# Altium PCB Telemetria.PcbDoc
Units mm, origin at the board's own origin, x right, y up, seen from the top; angles counter-clockwise.
Board outline 60.32 x 119.89 mm, 2 copper layers (Top Layer, Bottom Layer); 20 components, 15 nets, 82 pads, 8 vias.
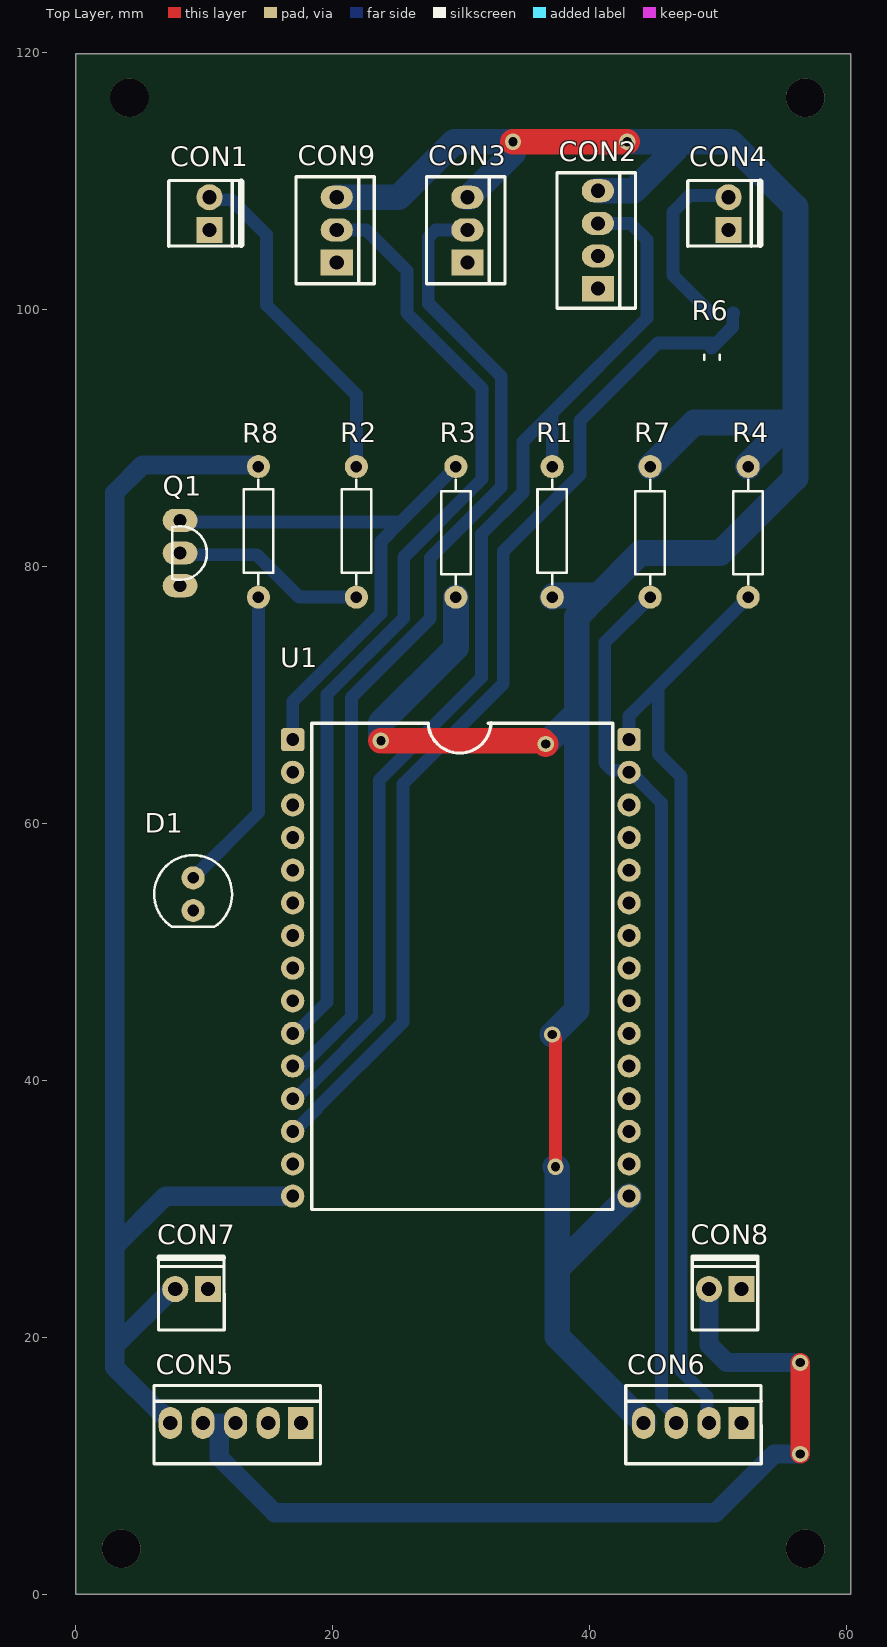
[diagram p0: Top Layer view]
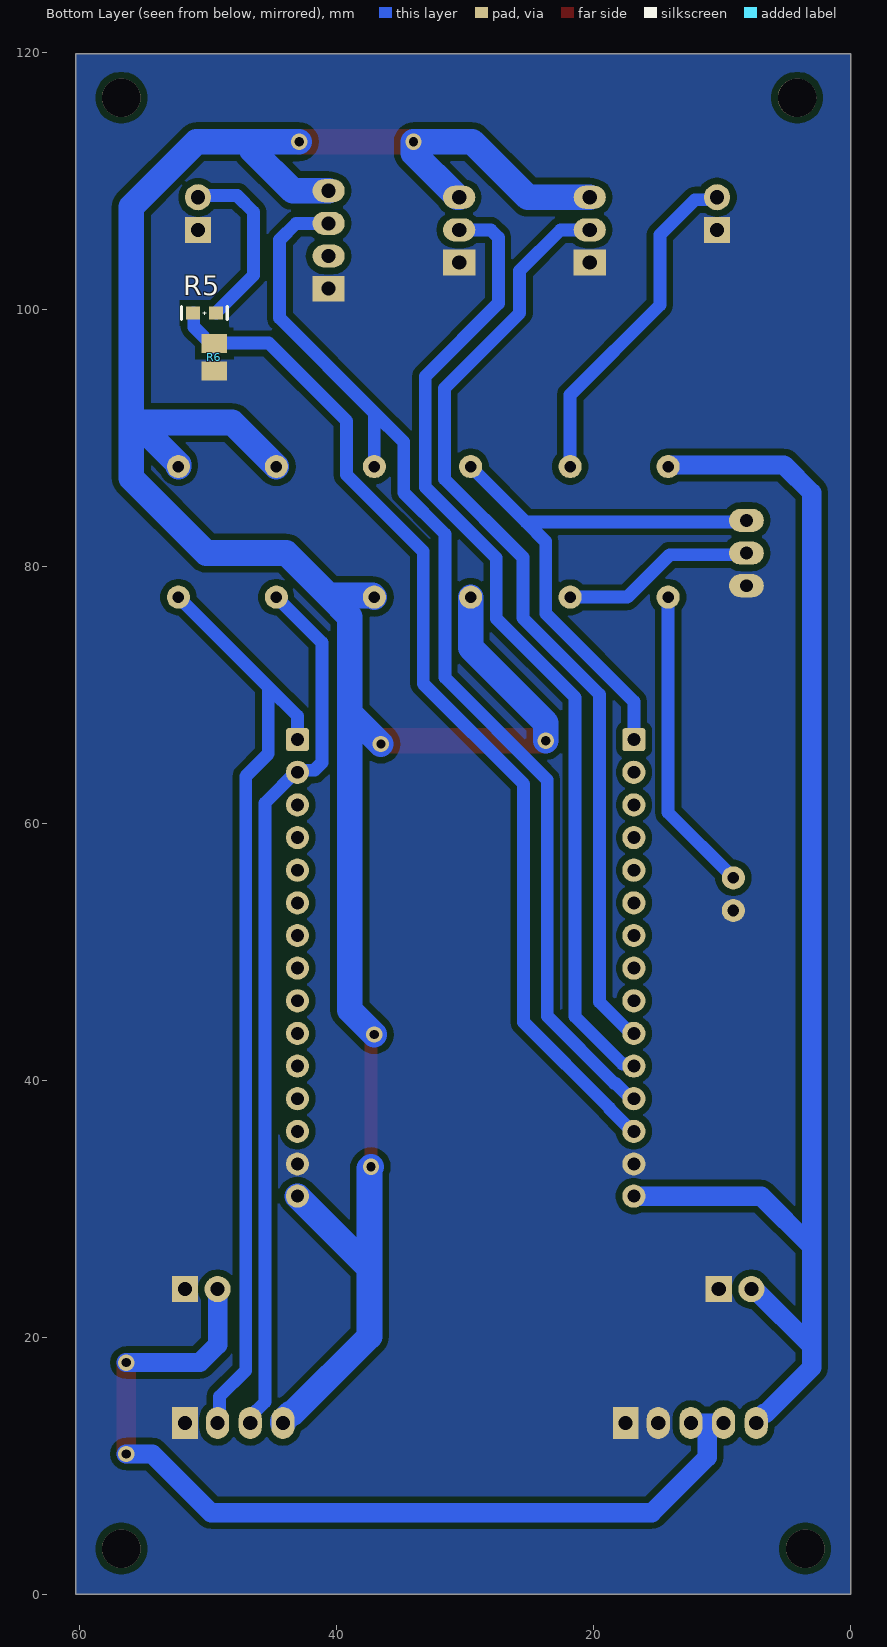
[diagram p1: Bottom Layer view, seen from below]

## Layer stack, top to bottom
Top Solder: solder mask 0.0102, Solder Resist, Dk 3.5
Top Layer: signal copper 0.0356
Dielectric 1: dielectric 0.32, FR-4, Dk 4.8
Bottom Layer: signal copper 0.0356
Bottom Solder: solder mask 0.0102, Solder Resist, Dk 3.5

## Board outline
0,0 60.325,0 60.325,119.888 0,119.888

## Design rules (kind name [scope] priority, off if disabled: settings)
Clearance [All] p1: gap=0.5 ignorepadtopadclearanceinfootprint=FALSE except(0: Arc-Text Arc-Hole Track-Text Track-Hole SMDPad-Text SMDPad-Hole THPad-Text THPad-Hole Via-Text Via-Hole Fill-Text Fill-Hole Poly-Text Poly-Hole Region-Text Region-Hole Text-Text Text-Hole)
ComponentClearance [All] p1: gap=0.3 collisioncheckmode=3 verticalgap=0.254 showdistances=FALSE
HoleSize [All] p1: absolutevalues=TRUE maxlimit=3 minlimit=0.75 maxpercent=80.000 minpercent=20.000
HoleToHoleClearance [All] p1: gap=0.1 allowstackedmicrovias=TRUE
MinimumSolderMaskSliver [All] p1: minsoldermaskwidth=0.05
PolygonConnect [All] p1: connectstyle=Relief reliefconductorwidth=0.254 reliefentries=4 polygonreliefangle="90 Angle" airgapwidth=0.254
RoomDefinition Telemetria [InComponentClass('Telemetria')] p1: confinementstyle=ConfineIn formatcopy=TRUE lockcomponents=FALSE outline -25.4,-25.4 25.4,-25.4 25.4,0 -25.4,0
RoutingVias [All] p1: holewidth=0.9 width=2 viastyle="Through Hole" minholewidth=0.9 minwidth=2 maxholewidth=0.9 maxwidth=2
SilkToSilkClearance [All] p1: silktosilkclearance=0
SilkToSolderMaskClearance [IsPad] p1: minsilkscreentomaskgap=0 clearancetoexposedcopper=TRUE
SolderMaskExpansion [All] p1: expansion=0.102 istentingtop=FALSE
Width [All] p1: maxlimit=5 minlimit=0.5 preferedwidth=1 minimp=50.000000 maximp=50.000000 favimp=50.000000
24 further rules are at their usual default settings.

## Components (designator, comment, footprint, x,y, rotation, side; value= is the part's Value field where it differs from the comment)
CON1 "KK_2.54_2vias" KK_2VIAS_180º 10.414,106.172 r90 top
CON2 "KK_2.54_4vias" KK_4vias_180° 40.64,101.6 r90 top
CON3 "KK_2.54_3vias" KK_3vias_180º 30.48,103.632 r90 top
CON4 "KK_2.54_2vias" KK_2VIAS_180º 50.8,106.172 r90 top
CON5 "KK_2.54_5vias" KK_5vias_180° 17.526,13.335 r180 top
CON6 "KK_2.54_4vias" KK_4vias_180° 51.816,13.335 r180 top
CON7 "KK_2.54_2vias" KK_2VIAS_180º 10.287,23.749 r180 top
CON8 "KK_2.54_2vias" KK_2VIAS_180º 51.816,23.749 r180 top
CON9 "KK_2.54_3vias" KK_3vias_180º 20.32,103.632 r90 top
D1 "LED 5MM RED" "LED 5MM RED" 9.144,54.483 r270 top
Q1 "BC549" TO92 8.128,81.026 r270 top
R1 "RES 470R 1/4W CARBON FILM" "RES 470R 1/4W CARBON FILM" 37.084,82.677 r90 top
R2 "RES 470R 1/4W CARBON FILM" "RES 470R 1/4W CARBON FILM" 21.844,82.677 r90 top
R3 "RES 470R 1/4W CARBON FILM" "RES 470R 1/4W CARBON FILM" 29.591,82.677 r270 top
R4 "4.7K" "RES 4.7K 1/4W CARBON FILM" 52.324,82.677 r270 top
R5 "1M6" "RESISTOR 0603" 50.292,99.695 r0 bottom
R6 "140K" "RESISTOR 0805" 49.53,96.266 r270 bottom
R7 "4.7K" "RES 4.7K 1/4W CARBON FILM" 44.704,82.677 r270 top
R8 "RES 470R 1/4W CARBON FILM" "RES 470R 1/4W CARBON FILM" 14.224,82.677 r90 top
U1 "microcontrolador" ESP32_Desvikit_v1 16.891,66.508 r0 top value="ESP32 Desvikit V1"

## Footprints (in the part's own frame and the unit in brackets; to place one, negate y for a bottom-side part, rotate by r counter-clockwise, add the part's x,y. Pads: shape width x height; smd on the part's side, far side on the other; paste and mask are expansions set on the pad)
ESP32_Desvikit_v1 [mm]
  rrect25% 1.8x1.8 hole 1: 1(0,0) 30(26.175,0)
  round 1.8 hole 1: 2(0,-2.54) 3(0,-5.08) 4(0,-7.62) 5(0,-10.16) 6(0,-12.7) 7(0,-15.24) 8(0,-17.78) 9(0,-20.32) 10(0,-22.86) 11(0,-25.4) 12(0,-27.94) 13(0,-30.48) 14(0,-33.02) 15(0,-35.52) 16(26.175,-35.52) 17(26.175,-33.02) 18(26.175,-30.48) 19(26.175,-27.94) 20(26.175,-25.4) 21(26.175,-22.86) 22(26.175,-20.32) 23(26.175,-17.78) 24(26.175,-15.24) 25(26.175,-12.7) 26(26.175,-10.16) 27(26.175,-7.62) 28(26.175,-5.08) 29(26.175,-2.54)
  silkscreen extent 1.47,-36.57 24.9,1.31, body extent -1.2,-46.07 27.48,4.86, height 16.2
KK_2VIAS_180º [mil]
  rect 80x80 hole 43.31: 1(0,0)
  round 80 hole 43.31: 2(100,0)
  silkscreen extent -50,-101 151,125, body extent -61,-108 165,128, height 464
KK_3vias_180º [mm]
  rect 2x2.5 hole 1.1: 1(0,0)
  oval 1.8x2.5 hole 1.1: 2(2.54,0) 3(5.08,0)
  silkscreen extent -1.65,-2.92 6.69,3.18, body extent -1.6,-2.95 6.69,3.05, height 11.9
KK_4vias_180° [mm]
  rect 2x2.5 hole 1.1: 1(0,0)
  oval 1.8x2.5 hole 1.1: 2(2.54,0) 3(5.08,0) 4(7.62,0)
  silkscreen extent -1.53,-2.92 9.02,3.18, body extent -1.4,-2.79 8.76,3.01, height 10.12
KK_5vias_180° [mm]
  rect 2x2.5 hole 1.1: 1(0,0)
  oval 1.8x2.5 hole 1.1: 2(2.54,0) 3(5.08,0) 4(7.62,0) 5(10.16,0)
  silkscreen extent -1.53,-2.92 11.43,3.18, body extent -1.4,-2.79 11.3,3.01, height 10.12
"LED 5MM RED" [mm]
  round 1.8 hole 0.9: 1(-1.27,0) 2(1.27,0)
  silkscreen extent -3.03,-3.03 2.54,3.03, body extent -2.98,-3.01 2.44,3.01, height 9.31
"RES 4.7K 1/4W CARBON FILM" [mm]
  round 1.8 hole 0.9: 1(-5.08,0) 2(5.08,0)
  silkscreen extent -4.06,-1.14 4.06,1.14, body extent -5.47,-1.27 5.47,1.27, height 3.27
"RES 470R 1/4W CARBON FILM" [mm]
  round 1.8 hole 0.9: 1(-5.08,0) 2(5.08,0)
  silkscreen extent -4.06,-1.14 4.06,1.14, body extent -5.47,-1.27 5.47,1.27, height 3.27
"RESISTOR 0603" [mm] "RES 5% 0603"
  rect 1.1x1 smd: 1(-0.877,-0.011) 2(0.889,0)
  silkscreen extent -1.77,-0.52 1.79,0.5, body extent -0.8,-0.4 0.8,0.4, height 0.3
"RESISTOR 0805" [mm] "Chip Resistor, 2-Leads, Body 2,00x1,25mm, IPC Low Density"
  rect 1.5x2 smd: 1(-1.075,0) 2(1.075,0)
  body extent -1,-0.63 1,0.63, height 0.6
TO92 [mm]
  oval 1.8x2.7 hole 1: 1(-2.54,0) 2(0,0) 3(2.54,0)
  silkscreen extent -2.09,-0.6 2.09,2.08, body extent -2.74,-0.57 2.74,2.04, height 6.83

## Part data
CON1 CON4 CON7 CON8: "Conector KK 2.54mm 2 vias", Descrição="Conector KK 3 vias com passo 2.54mm", Encapsulamento="PTH - 180º", Modelo="2 vias - 180º", Valor="KK 2 vias 180º"
CON2 CON6: "Conector KK 2.54mm 4 vias", Descrição="Conector KK 3 vias com passo 2.54mm", Encapsulamento="PTH - 180º", Modelo="3 vias - 180º", Valor="KK 4 vias 180º"
CON3 CON9: "Conector KK 2.54mm 3 vias", Descrição="Conector KK 3 vias com passo 2.54mm", Encapsulamento="PTH - 180º", Modelo="3 vias - 180º", Valor="KK 3 vias 180º"
CON5: "Conector KK 2.54mm 5 vias", Descrição="Conector KK 3 vias com passo 2.54mm", Encapsulamento="PTH - 180º", Modelo="3 vias - 180º", Valor="KK 5 vias 180º"
D1: Current If Luminous Intensity=2, Forward Current If=20, Forward Voltage VF Max=2.5, LED Colour=Red, Manufacturer=Paralight, Manufacturer Part Number=IMP585, Operating Temperature Max=85, Operating Temperature Min=-40, Operating Temperature Range="-40°C to +85", Peak Forward Current=7, Supplier Part Number 1="Led 3mm Vermelho Difuso L-314HD - Paralight", Voltage Vf Typ="2.2V<!--FANDB--><div class=\"features-and-benefits-container\"><div class=\"features-and-benefits-description\"><span class=\"features-benefits-value\">The L-934LID from Kingbright is a through hole round shape high efficiency red colour LED. The device is made of gallium arsenide phosphide on gallium phosphide orange light emitting diode. This LED is widely used because of low power consumption, long life and solid state reliability.</span></div><div class=\"features-and-benefits-list\"><ul class=\"features-and-benefits-list-list\"><li class=\"features-and-benefits-list-item\">Standard bulb size of T-1 (3mm)</li><li class=\"features-and-benefits-list-item\">Reliable and rugged</li><li class=\"features-and-benefits-list-item\">Viewing angle is 60°</li><li class=\"features-and-benefits-list-item\">Luminous intensity of 3mcd at 2mA</li><li class=\"features-and-benefits-list-item\">Forward voltage is 2.0V</li><li class=\"features-and-benefits-list-item\">Forward current (If) is 20mA</li><li class=\"features-and-benefits-list-item\">Dominant wavelength is 625nm at IF=20mA</li><li class=\"features-and-benefits-list-item\">Peak wavelength is 627nm at IF=20", Bulb Size=3mm, ComponentLink1Description=http://loja.multcomercial.com.br/led-3mm-vermelho-difuso-l-314hd-paralight.html, ComponentLink1URL=http://loja.multcomercial.com.br/led-3mm-vermelho-difuso-l-314hd-paralight.html, Dominant Wavelength=625, External Diameter=2.9, External Length / Height=4.6, Forward Current If Max=20, Forward Voltage=2, Lead Cross-section Depth=0.5, Lead Cross-section Width=0.5, Lead Spacing=2.54, LED / Lamp Size="3mm / T-1", LED Mounting="Through Hole", LED Type=Standard, Lens Shape=Round, Luminous Intensity=3, Luminous Intensity @ If Min=0.7, Luminous Intensity Typ=3, Mounting Type="PCB Through Hole", MSL=-, No. of Pins=2, Packaging=Each, Peak Wavelength=625, PIV Max=5, Pricing 1="1=0.15 (BRL)", RoHS=YES, Stock 1=35260, Supplier 1="Mult Comercial", SVHC="No SVHC (15-Jun-2015)", Viewing Angle=60°, Wavelength Typ=625
Q1: "TRANS NPN 30V 0.1A TO-92", Collector- Base Voltage VCBO="30 V", Collector-Emitter Saturation Voltage="200 mV", DC Current Gain hFE Max=800, Emitter- Base Voltage VEBO="5 V", Manufacturer="Fairchild Semiconductor", Maximum DC Collector Current="0.1 A", Maximum Operating Temperature="+ 150 C", Maximum Power Dissipation="0.5 W", Minimum Operating Temperature="- 65 C", Package / Case=TO-92-3, Supplier Part Number 1=512-BC549, Brand="Fairchild Semiconductor", Collector- Emitter Voltage VCEO Max="30 V", ComponentLink1Description=https://datasheet.ciiva.com/982/bc546-982130.pdf, ComponentLink1URL=https://datasheet.ciiva.com/982/bc546-982130.pdf, ComponentLink2Description=https://datasheet.ciiva.com/17179/bc549-17179663.pdf, ComponentLink2URL=https://datasheet.ciiva.com/17179/bc549-17179663.pdf, Configuration=Single, DC Collector/Base Gain hfe Min=110, Factory Pack Quantity=2000, Gain Bandwidth Product fT="300 MHz", Manufacturer Part Number=BC549, Mounting Style="Through Hole", Packaging=Bulk, Product Category="Bipolar Transistors - BJT", RoHS=Details, Series=BC549, Supplier 1=Mouser, Transistor Polarity=NPN
R1: "RES 470R OHM 1/4W 5% CARBON FILM", Manufacturer=Ty-Ohm, Manufacturer Part Number=CR25, Operating Temperature="-55°C ~ 155°C", Package / Case=Axial, Power (Watts)="0.25W, 1/4W", Resistance (Ohms)=10kR, Supplier Part Number 1="Resistor de Filme de Carbono 1/4 de Watt CR25 5% de tolerância - 0.22R Ω à 10M Ω", Temperature Coefficient="0/ -500ppm/°C", Tolerance=±5%, Category=Resistors, ComponentLink1Description=http://loja.multcomercial.com.br/resistor-de-1-4-de-watt-cr25-5-de-tolerancia.html, ComponentLink1URL=http://loja.multcomercial.com.br/resistor-de-1-4-de-watt-cr25-5-de-tolerancia.html, Composition="Carbon Film", Features="Flame Retardant Coating, Safety", Height=-, Number of Terminations=2, Packaging="Cut Tape (CT)", Pricing 1="1=0.20 (BRL)", RoHS="RoHS Compliant", Size / Dimension="0.091\" Dia x 0.256\" L (2.30mm x 6.50mm)", Stock 1=617543, Supplier 1="Mult Comercial", Supplier Device Package=Axial
R2 R3: "RES 470R OHM 1/4W 5% CARBON FILM", Manufacturer=Ty-Ohm, Manufacturer Part Number=CR25, Operating Temperature="-55°C ~ 155°C", Package / Case=Axial, Power (Watts)="0.25W, 1/4W", Resistance (Ohms)=2200R, Supplier Part Number 1="Resistor de Filme de Carbono 1/4 de Watt CR25 5% de tolerância - 0.22R Ω à 10M Ω", Temperature Coefficient="0/ -500ppm/°C", Tolerance=±5%, Category=Resistors, ComponentLink1Description=http://loja.multcomercial.com.br/resistor-de-1-4-de-watt-cr25-5-de-tolerancia.html, ComponentLink1URL=http://loja.multcomercial.com.br/resistor-de-1-4-de-watt-cr25-5-de-tolerancia.html, Composition="Carbon Film", Features="Flame Retardant Coating, Safety", Height=-, Number of Terminations=2, Packaging="Cut Tape (CT)", Pricing 1="1=0.20 (BRL)", RoHS="RoHS Compliant", Size / Dimension="0.091\" Dia x 0.256\" L (2.30mm x 6.50mm)", Stock 1=617543, Supplier 1="Mult Comercial", Supplier Device Package=Axial
R4 R7: library part "RES 4.7K 1/4W CARBON FILM", "RES 4.7K OHM 1/4W 5% CARBON FILM", Manufacturer=Ty-Ohm, Manufacturer Part Number=CR25, Operating Temperature="-55°C ~ 155°C", Package / Case=Axial, Power (Watts)="0.25W, 1/4W", Resistance (Ohms)=?, Supplier Part Number 1="Resistor de Filme de Carbono 1/4 de Watt CR25 5% de tolerância - 0.22R Ω à 10M Ω", Temperature Coefficient="0/ -500ppm/°C", Tolerance=±5%, Category=Resistors, ComponentLink1Description=http://loja.multcomercial.com.br/resistor-de-1-4-de-watt-cr25-5-de-tolerancia.html, ComponentLink1URL=http://loja.multcomercial.com.br/resistor-de-1-4-de-watt-cr25-5-de-tolerancia.html, Composition="Carbon Film", Features="Flame Retardant Coating, Safety", Height=-, Number of Terminations=2, Packaging="Cut Tape (CT)", Pricing 1="1=0.20 (BRL)", RoHS="RoHS Compliant", Size / Dimension="0.091\" Dia x 0.256\" L (2.30mm x 6.50mm)", Stock 1=617543, Supplier 1="Mult Comercial", Supplier Device Package=Axial
R5: library part "RES 0R 5% 0603", Case Code - in=0603, Case Code - mm=1608, Manufacturer="PANASONIC ELECTRONIC COMPONENTS", Manufacturer Part Number=ERJ-3GEY0R00V, Operating Temperature="-55°C ~ 155°C", Operating Temperature Range="- 55 C to + 155 C", Package / Case="0603 (1608 Metric)", Power (Watts)="0.1W, 1/10W", Power Rating=100, Resistance=0, Resistance (Ohms)=0.0, Resistance Tolerance=-, Resistor Case Style="0603 [1608 Metric]", Supplier Part Number 1=667-ERJ-3GEY0R00V, Tolerance=Jumper, Voltage Rating=75, Brand=Panasonic, Category=Resistors, ComponentLink1Description=http://www.farnell.com/cad/1697908.zip, ComponentLink1URL=http://www.farnell.com/cad/1697908.zip, ComponentLink2Description=http://www.farnell.com/datasheets/1678796.pdf, ComponentLink2URL=http://www.farnell.com/datasheets/1678796.pdf, ComponentLink3Description=http://industrial.panasonic.com/www-cgi/jvcr13pz.cgi?E+PZ+3+AOA0001+ERJ3GEY0R00V+7+WW, ComponentLink3URL=http://industrial.panasonic.com/www-cgi/jvcr13pz.cgi?E+PZ+3+AOA0001+ERJ3GEY0R00V+7+WW, ComponentLink4Description=http://www.mouser.com/ds/2/315/AOA0000C84-947596.pdf, ComponentLink4URL=http://www.mouser.com/ds/2/315/AOA0000C84-947596.pdf, Composition="Thick Film", Features="Automotive AEC-Q200", Height="0.022\" (0.55mm)", Length="1.6 mm", Minimum Order Quantity=1, MSL=-, Number of Terminations=2, Packaging="Cut Tape", Pricing 1="1=0.160, 10=0.019, 100=0.013, 500=0.010, 1000=0.005, 5000=0.003 (AUD)", Product="Thick Film Resistors Zero-Ohm", Product Range="AEC-Q200 ERJ3", Qualification=AEC-Q200, Reeling=True, RoHS=YES, RoHS - Mouser=E, Series=ERJ, Size / Dimension="0.063\" L x 0.031\" W (1.60mm x 0.80mm)", Stock 1=1987085, Supplier 1=Mouser, Supplier Device Package=0603, Temperature Coefficient=-, Termination Style=SMD/SMT, Type="Thick Film Resistors SMD", Width="0.8 mm"
R6: library part "RES 220R 0805", Manufacturer=Panasonic, Manufacturer Part Number=ERJP06F2200V, ComponentLink1Description=http://www.alliedelec.com/m/d/0ad461061842af8edcaf7ac114212a8c.pdf, ComponentLink1URL=http://www.alliedelec.com/m/d/0ad461061842af8edcaf7ac114212a8c.pdf, ComponentLink2Description=http://www.alliedelec.com/panasonic-erjp06f2200v/70348978/, ComponentLink2URL=http://www.alliedelec.com/panasonic-erjp06f2200v/70348978/, Pricing 1="50=0.0376, 125=0.0339, 250=0.0308, 500=0.0282 (USD)", RoHS=No, Stock 1=0, Supplier 1=Allied
R8: "RES 470R OHM 1/4W 5% CARBON FILM", Manufacturer=Ty-Ohm, Manufacturer Part Number=CR25, Operating Temperature="-55°C ~ 155°C", Package / Case=Axial, Power (Watts)="0.25W, 1/4W", Resistance (Ohms)=910R, Supplier Part Number 1="Resistor de Filme de Carbono 1/4 de Watt CR25 5% de tolerância - 0.22R Ω à 10M Ω", Temperature Coefficient="0/ -500ppm/°C", Tolerance=±5%, Category=Resistors, ComponentLink1Description=http://loja.multcomercial.com.br/resistor-de-1-4-de-watt-cr25-5-de-tolerancia.html, ComponentLink1URL=http://loja.multcomercial.com.br/resistor-de-1-4-de-watt-cr25-5-de-tolerancia.html, Composition="Carbon Film", Features="Flame Retardant Coating, Safety", Height=-, Number of Terminations=2, Packaging="Cut Tape (CT)", Pricing 1="1=0.20 (BRL)", RoHS="RoHS Compliant", Size / Dimension="0.091\" Dia x 0.256\" L (2.30mm x 6.50mm)", Stock 1=617543, Supplier 1="Mult Comercial", Supplier Device Package=Axial
U1: library part "ESP32 Desvikit v1", "microcontrolador com moculo bluethoth e wifi"

## Free pads (board coordinates)
  round 3 hole 3: 6(4.191,116.459) 6(56.769,116.459) 7(56.769,3.556) 8(3.556,3.556)

## Via types
v1: diameter 1.27, hole 0.711, Top Layer to Bottom Layer, 8 vias

## Nets (pads, with @x,y where several pads share a name; then routed paths per layer and width w, separated by ;. In a path a pad name is that pad's centre, name@x,y a point inside that pad or via, vN(x,y) a via of type N, cw(c..) or ccw(c..) an arc to the next point about the centre after c; other vN are vias at no path point)
3V3p: CON2.4 CON3.3 CON6.4 CON9.3 R1.1 R3.2 R4.1 R7.1 U1.16 | length 221.6
  Top Layer w1: v1(37.084,43.561) 37.084,43.488 37.338,43.234 v1(37.338,33.274)
  Top Layer w2: v1(23.749,66.421) 36.322,66.421 v1(36.576,66.167) ; v1(34.036,113.03) v1(42.926,113.03)
  Bottom Layer w2: CON9.3 25.146,108.712 29.464,113.03 v1(34.036,113.03) 34.036,112.141 30.83,108.935 30.83,108.912 30.63,108.712 CON3.3 ; v1(23.749,66.421) 23.749,67.818 29.591,73.66 R3.2 ; v1(36.576,66.167) 38.989,68.58 ; v1(37.084,43.561) 38.989,45.466 38.989,68.58 ; R1.1 37.211,77.724 40.64,77.724 ; v1(37.338,33.274) 37.465,33.147 37.465,25.387 ; CON2.4 43.434,109.22 46.609,112.395 46.609,113.03 ; v1(42.926,113.03) 46.609,113.03 ; U1.16 37.465,25.387 ; CON6.4 44.196,13.469 43.58,14.085 43.446,14.085 37.465,20.066 37.465,25.387 ; R7.1 48.133,91.186 55.569,91.186 ; R4.1 52.324,87.941 56.007,91.624 ; 38.989,68.58 38.989,76.073 40.64,77.724 ; 40.64,77.724 43.942,81.026 50.165,81.026 56.007,86.868 56.007,91.624 ; 46.609,113.03 50.927,113.03 56.007,107.95 56.007,91.624
+5: CON5.3 CON5.4 CON8.2 | length 73.2
  Top Layer w1.5: v1(56.388,10.922) v1(56.388,18.034)
  Bottom Layer w1.5: CON5.4 11.176,13.335 ; CON5.3 11.176,13.335 ; CON8.2 49.276,19.431 50.673,18.034 v1(56.388,18.034) ; v1(56.388,10.922) 54.356,10.922 49.784,6.35 15.494,6.35 11.176,10.668 11.176,13.335
+12: CON5.5 CON7.2 R8.2 U1.15 | length 108.4
  Bottom Layer w1.5: CON5.5 7.366,13.469 6.75,14.085 6.616,14.085 3.048,17.653 3.048,19.304 ; CON7.2 7.493,23.749 3.048,19.304 ; R8.2 14.097,87.884 5.207,87.884 3.048,85.725 3.048,27.051 ; U1.15 6.985,30.988 3.048,27.051 ; 3.048,19.304 3.048,27.051
Corrente1: CON3.2 U1.11 | length 77.3
  Bottom Layer w1: U1.11 17.044,41.261 17.766,41.261 21.463,44.958 21.463,69.798 27.591,75.926 27.591,80.639 33.123,86.171 33.123,94.766 27.432,100.457 27.432,105.586 28.018,106.172 CON3.2
Corrente2: CON9.2 U1.10 | length 74.8
  Bottom Layer w1: U1.10 17.105,43.648 19.558,46.101 19.558,70.015 25.527,75.984 25.527,80.697 31.623,86.793 31.623,93.853 25.781,99.695 25.781,102.997 22.606,106.172 CON9.2
en: Q1.1 R3.1 U1.1 | length 43.7
  Bottom Layer w1: Q1.1 8.255,83.439 25.273,83.439 ; U1.1 16.891,69.469 23.749,76.327 23.749,81.915 25.273,83.439 ; R3.1 25.273,83.439
GND: CON1.1 CON2.1 CON3.1 CON4.1 CON5.1 CON5.2 CON6.1 CON7.1 CON8.1 CON9.1 D1.2 Q1.3 R6.2 U1.14 U1.17
NetCON1_2: CON1.2 R2.2 | length 26.6
  Bottom Layer w1: CON1.2 10.611,108.515 12.135,108.515 14.859,105.791 14.859,100.33 21.844,93.345 R2.2
NetD1_1: D1.1 R8.1 | length 23.9
  Bottom Layer w1: D1.1 14.224,60.833 R8.1
NetQ1_2: Q1.2 R2.1 | length 15.1
  Bottom Layer w1: Q1.2 8.255,80.899 14.097,80.899 17.399,77.597 R2.1
SCL_IN: CON6.2 R4.2 U1.30 | length 73.8
  Bottom Layer w1: U1.30 43.066,68.339 45.339,70.612 ; CON6.2 49.123,13.488 49.123,15.393 47.093,17.423 47.093,63.651 45.339,65.405 45.339,70.612 ; R4.2 45.339,70.612
SDA_IN: CON6.3 R7.2 U1.29 | length 68.8
  Bottom Layer w1: R7.2 41.166,74.059 41.166,64.707 41.752,64.121 42.347,64.121 43.06,64.121 45.593,61.588 45.593,14.975 46.736,13.832 CON6.3
Temperatura: CON2.3 R1.2 U1.12 | length 87
  Bottom Layer w1: U1.12 17.107,38.568 18.301,39.761 18.387,39.761 23.622,44.996 23.622,63.373 31.591,71.342 31.591,82.518 34.798,85.725 34.798,89.662 37.084,91.948 ; R1.2 37.084,91.948 ; CON2.3 43.18,106.68 44.45,105.41 44.45,99.314 37.084,91.948
TensãoBat: R5.2 R6.1 U1.13 | length 80.8
  Bottom Layer w1: U1.13 17.038,36.028 18.791,37.781 18.791,37.841 25.463,44.514 25.463,63.055 33.274,70.866 33.274,81.153 39.243,87.122 39.243,91.313 45.299,97.369 R6.1@49.471,97.369 ; R6.1@49.471,96.969 51.131,98.629 51.131,99.695 R5.2
VCC: CON4.2 R5.1 | length 13.7
  Bottom Layer w1: R5.1 49.365,99.706 49.365,99.756 46.482,102.639 46.482,107.569 47.752,108.839 CON4.2@50.24,108.839 ; CON4.2 CON4.2@50.997,108.515
pads on no net: CON2.2 U1.2 U1.3 U1.4 U1.5 U1.6 U1.7 U1.8 U1.9 U1.18 U1.19 U1.20 U1.21 U1.22 U1.23 U1.24 U1.25 U1.26 U1.27 U1.28

## Polygon pours and split planes (outlines as drawn)
GND on Bottom Layer "GND_L02_P000" (solid, pour order 0): 0,0 60.325,0 60.325,119.888 0,119.888

## Text inside footprints (layer, text, board x,y; h text height)
D1: Mechanical 29 "K" at 7.62,53.848 h0.5 r270; Mechanical 29 "A" at 7.62,55.626 h0.5 r270
Q1: Mechanical 29 "1" at 9.528,84.226 h0.5 r270
R1: Mechanical 29 "1" at 38.1,78.74 h0.5 r90
R2: Mechanical 29 "1" at 22.86,78.74 h0.5 r90
R3: Mechanical 29 "1" at 28.575,86.614 h0.5 r270
R4: Mechanical 29 "1" at 51.308,86.614 h0.5 r270
R7: Mechanical 29 "1" at 43.688,86.614 h0.5 r270
R8: Mechanical 29 "1" at 15.24,78.74 h0.5 r90